# Altium PCB PCB1.PcbDoc
Units mil, origin at the board's own origin, x right, y up, seen from the top; angles counter-clockwise.
Board outline 1989.03 x 1762.03 mil, 2 copper layers (Top Layer, Bottom Layer); 10 components, 18 nets, 219 pads, 0 vias.
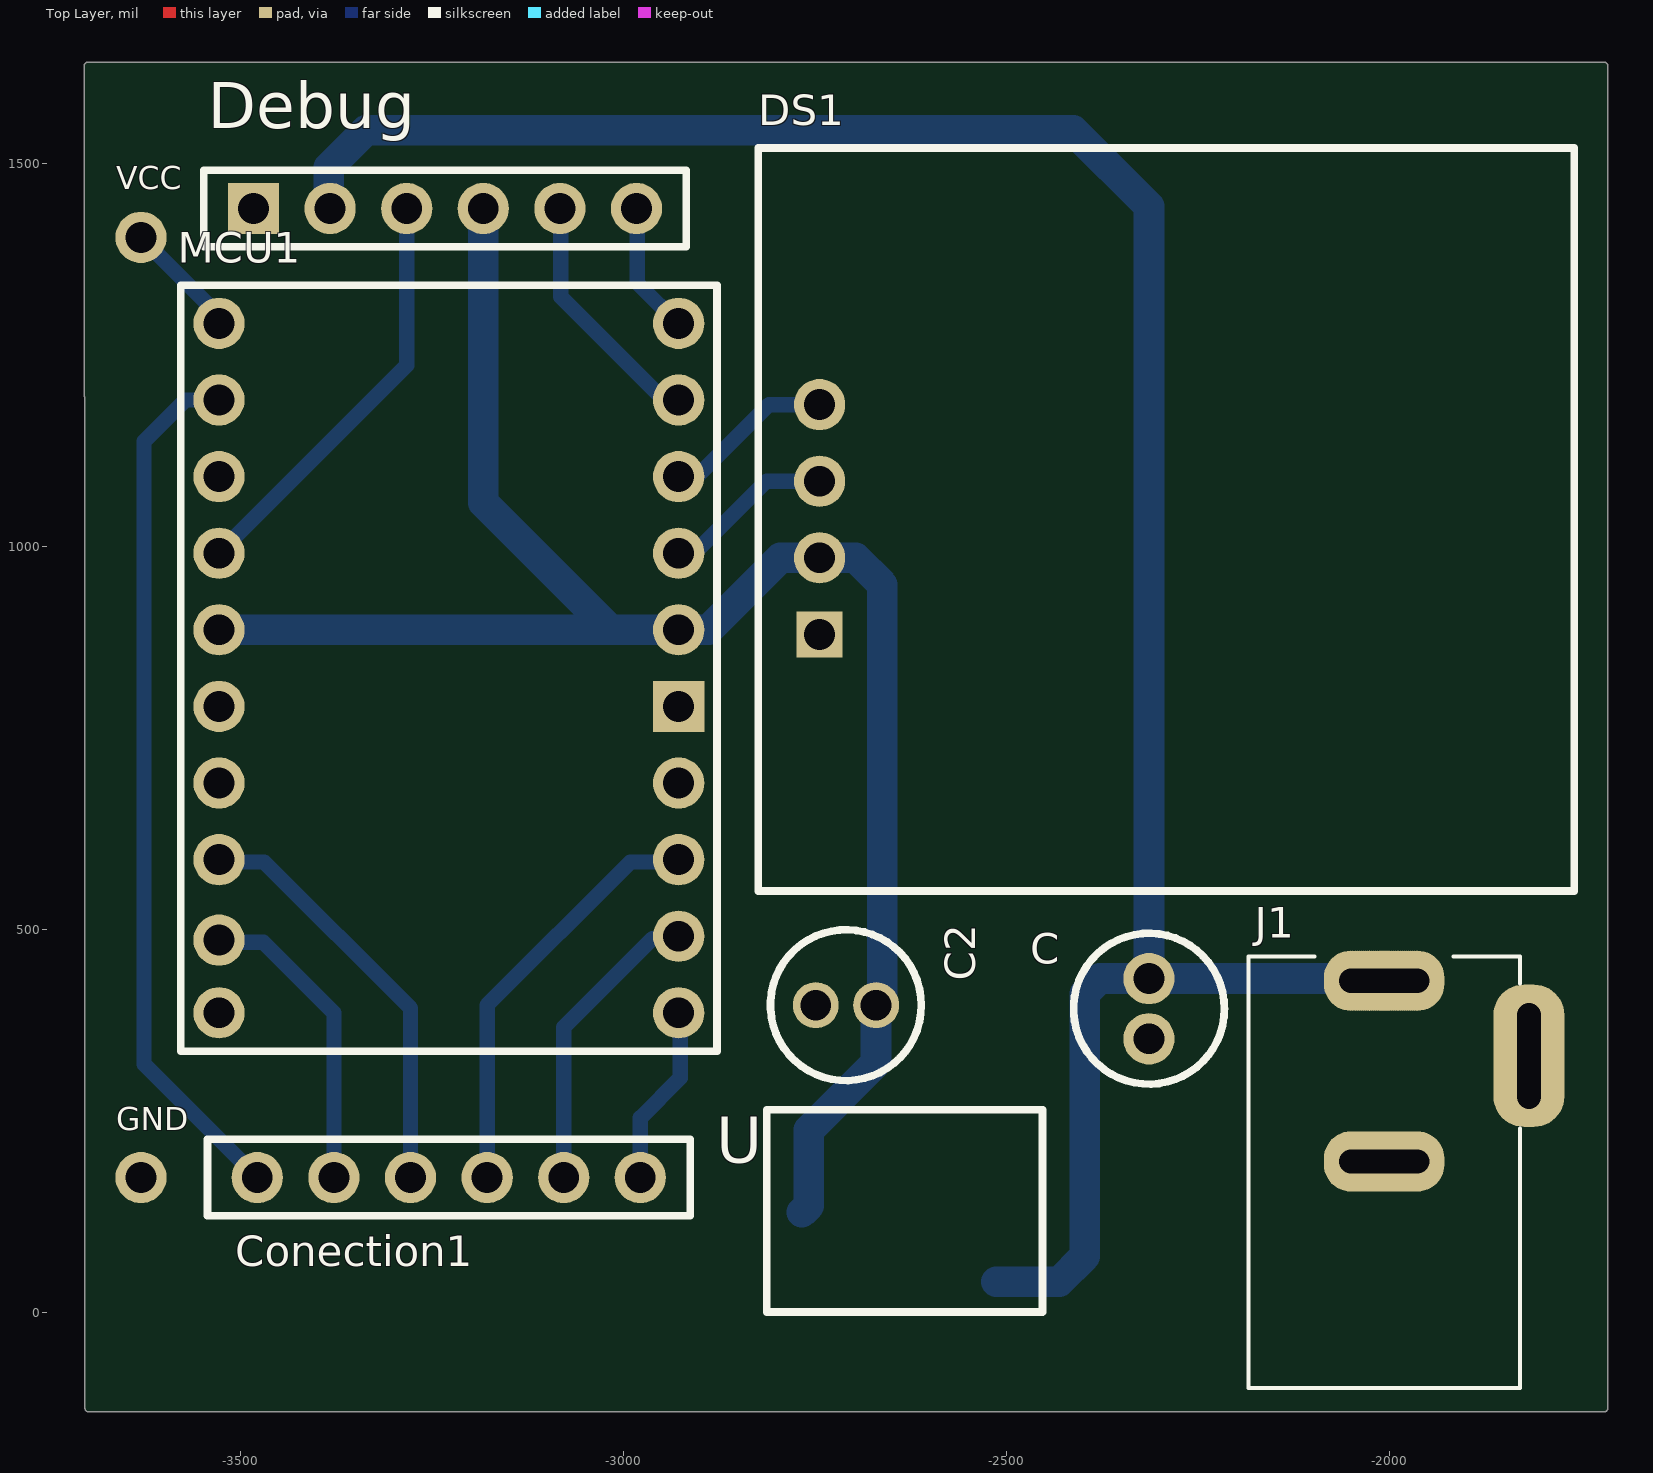
[diagram p0: Top Layer view]
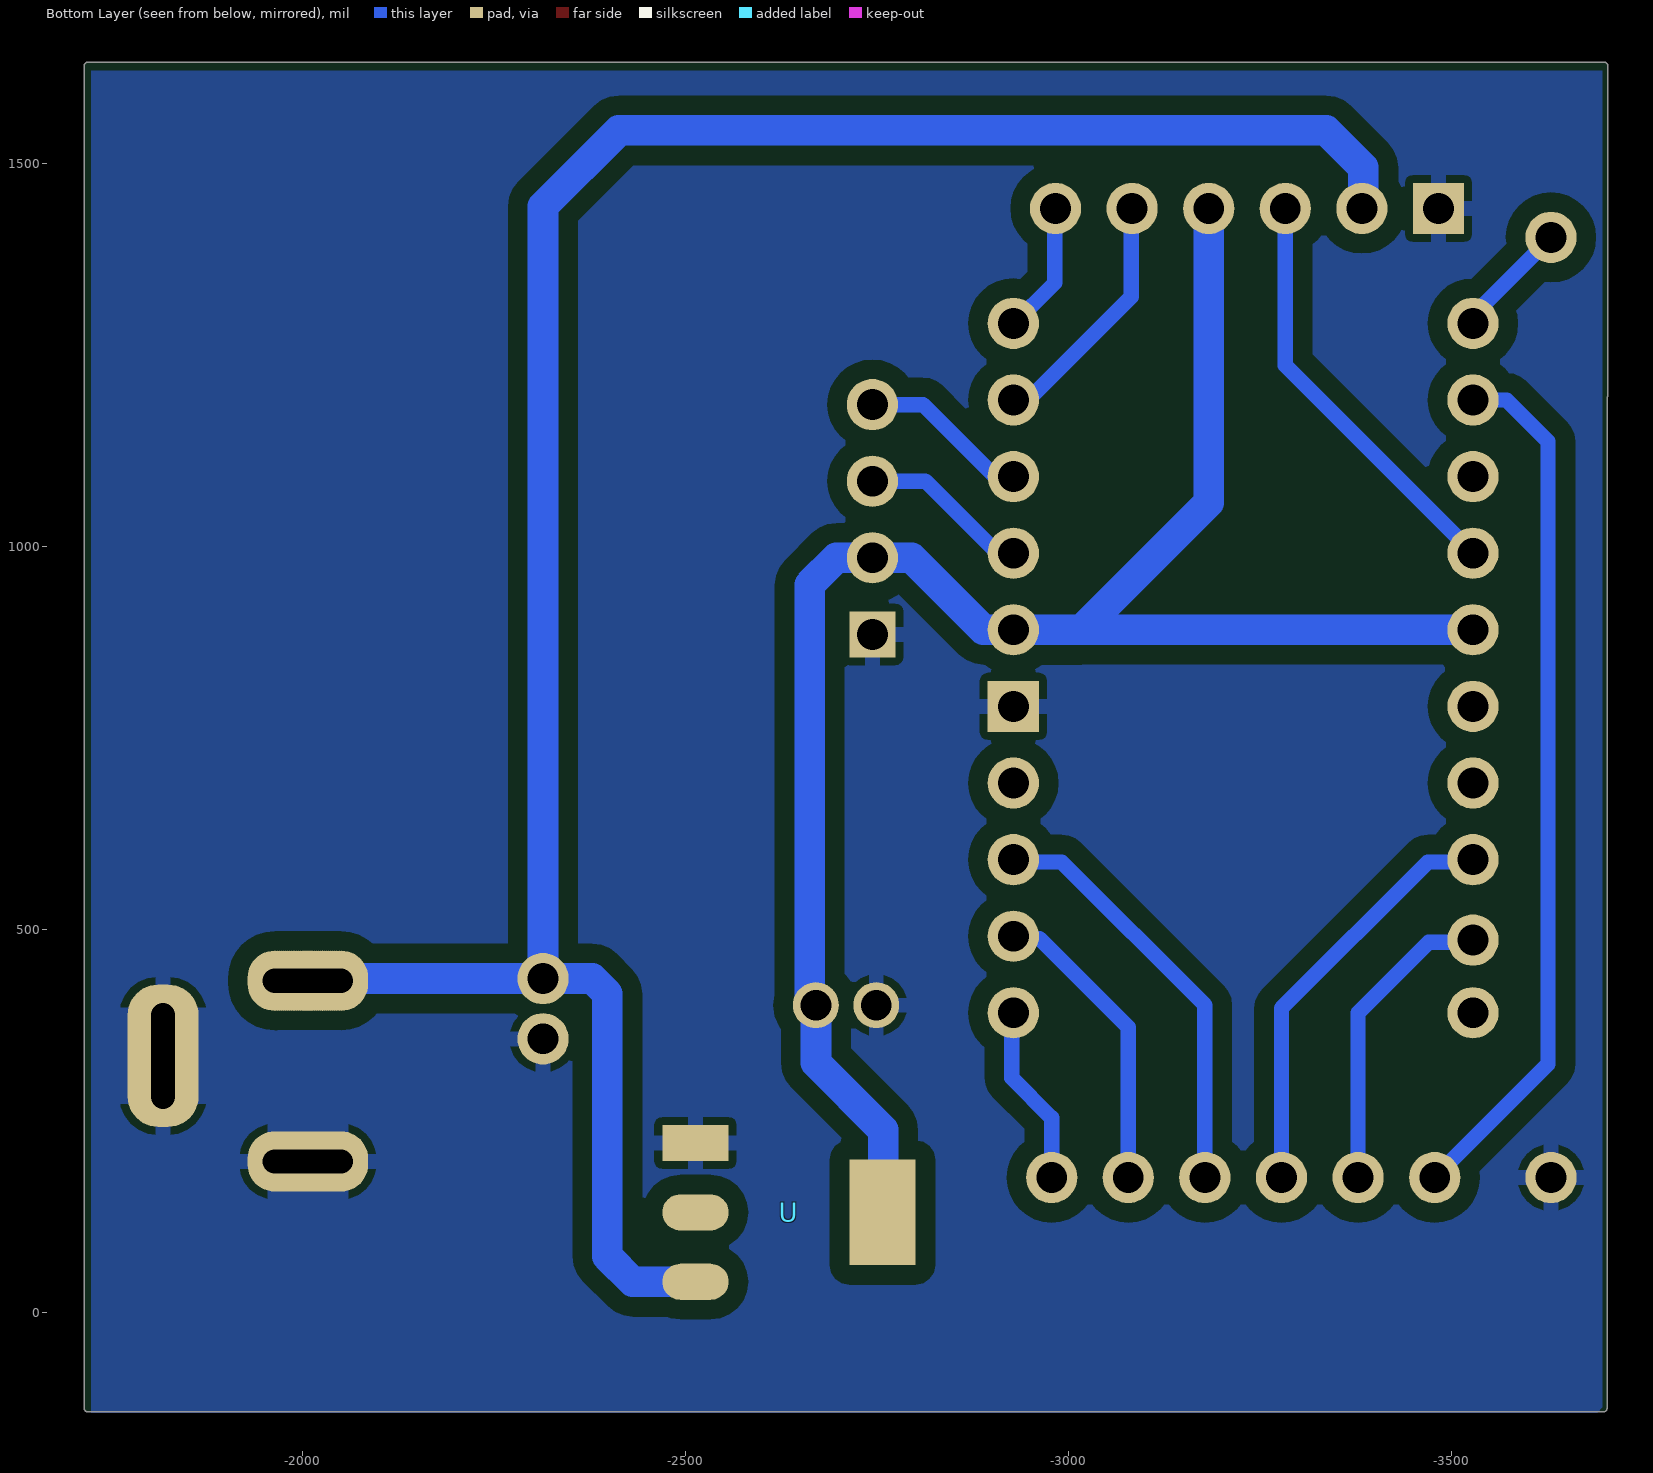
[diagram p1: Bottom Layer view, seen from below]

## Layer stack, top to bottom
Top Solder: solder mask 0.4, Solder Resist, Dk 3.5
Top Layer: signal copper 1.4
Dielectric 1: dielectric 12.6, FR-4, Dk 4.8
Bottom Layer: signal copper 1.4
Bottom Solder: solder mask 0.4, Solder Resist, Dk 3.5

## Board outline
-3703.01,-125 -3703.01,1193.99 cw(c-3699,1197) -3704.01,1197 -3704.01,1627 cw(c-3699,1627) -3699,1632.02 -1720,1632.02 cw(c-1720,1627) -1714.98,1627 -1714.98,-125 cw(c-1720,-125) -1720,-130.01 -3698,-130.01 cw(c-3698,-125)

## Design rules (kind name [scope] priority, off if disabled: settings)
Clearance [All] p1: gap=25 ignorepadtopadclearanceinfootprint=TRUE
HoleToHoleClearance [Not InComponent('J1')] p1: gap=10 allowstackedmicrovias=TRUE
PlaneConnect [InNet('GND')] p1: planeconnectstyle=Relief reliefexpansion=20 reliefentries=4 reliefconductorwidth=20 reliefairgap=10
PolygonConnect [InNet('GND') vs InNet('GND')] p1: connectstyle=Relief reliefconductorwidth=20 reliefentries=4 polygonreliefangle="90 Angle" airgapwidth=10
RoutingVias [All] p1: holewidth=28 width=50 viastyle="Through Hole" minholewidth=28 minwidth=50 maxholewidth=28 maxwidth=50
SolderMaskExpansion [All] p1: expansion=4
Width [All] p1: maxlimit=50 minlimit=10 preferedwidth=10 minimp=50.000000 maximp=50.000000 favimp=50.000000
28 further rules are at their usual default settings.

## Components (designator, comment, footprint, x,y, rotation, side; value= is the part's Value field where it differs from the comment)
C "Capacitor Eletrolítico" Capacitor#1 -2314,435.74 r270 top value="R$: 0.70 /5 unidades"
C2 "22uF" Capacitor#2 -2670.26,401 r180 top value="R$: 0.70 /5 unidades"
Conection1 "Conectionwires" CONECTIONWIRES -2908,216 r180 top
Debug "Debugwires" DEBUGWIRES -2913,1496 r180 top
DS1 "Display 0.96 pol" "Display oled" -2744,885 r90 top
GND "Pad" Pad -3629.82,176 r90 top
J1 "DC-005" NINIGI_DC-005 -1817,-105.5 r90 top
MCU1 "Processor" Processor -3528,591 r0 top
U "AZ1117" AZ1117 -2513,39.9 r90 top
VCC "Pad" Pad -3629.81,1403.23 r90 top

## Footprints (in the part's own frame and the unit in brackets; to place one, negate y for a bottom-side part, rotate by r counter-clockwise, add the part's x,y. Pads: shape width x height; smd on the part's side, far side on the other; paste and mask are expansions set on the pad)
AZ1117 [mm]
  rect 1.2x2.2 smd far side: GND(4.6,0)
  oval 1.2x2.2 smd far side: V-IN(0,0) V-OUT-1(2.3,0)
  rect 3.5x2.2 smd far side: V-OUT(2.3,6.2)
  silkscreen extent -1,-1.52 5.7,7.62
Capacitor#1 [mm]
  round 1.7 hole 1.016: +(0,0) -(2,0)
  silkscreen extent -1.5,-2.5 3.5,2.5
Capacitor#2 [mm]
  round 1.524 hole 1.016: +(0,0) -(2,0)
  silkscreen extent -1.5,-2.5 3.5,2.5
CONECTIONWIRES [mm]
  round 1.7 hole 1.02: PA2(9.398,1.016) PA3(11.938,1.016) PA5(1.778,1.016) PA6(4.318,1.016) PA7(6.858,1.016) PF-0(14.478,1.016)
  silkscreen extent 0.13,-0.25 16.13,2.29
DEBUGWIRES [mm]
  round 1.7 hole 1.02: 3v3(6.858,1.397) PA13(4.318,1.397) PA14(1.778,1.397) RESET(9.398,1.397) VCC(11.938,1.397)
  rect 1.7x1.7 hole 1.02: GND(14.478,1.397)
  silkscreen extent 0.13,0.13 16.13,2.67
"Display oled" [mm] "24.7x27"
  rect 1.524x1.524 hole 1.02: GND(0,0)
  round 1.7 hole 1.02: SCK(5.08,0) SDA(7.62,0) VCC(2.54,0)
  silkscreen extent -8.51,-25.02 16.13,2.03
NINIGI_DC-005 [mm]
  oval 2x2.35 hole 0.8: 2(9.83,0.025) 2(9.902,0.025) 2(9.974,0.025) 2(10.046,0.025) 2(10.109,0.025) 2(10.181,0.025) 2(10.253,0.025) 2(10.325,0.025) 2(10.389,0.025) 2(10.46,0.025) 2(10.532,0.025) 2(10.604,0.025) 2(10.668,0.025) 2(10.74,0.025) 2(10.812,0.025) 2(10.884,0.025) 2(10.947,0.025) 2(11.019,0.025) 2(11.091,0.025) 2(11.163,0.025) 2(11.227,0.025) 2(11.299,0.025) 2(11.371,0.025) 2(11.443,0.025) 2(11.506,0.025) 2(11.578,0.025) 2(11.65,0.025) 2(11.722,0.025) 2(11.786,0.025) 2(11.857,0.025) 2(11.929,0.025) 2(12.001,0.025) 2(12.065,0.025) 2(12.137,0.025) 2(12.209,0.025) 2(12.281,0.025) 2(12.344,0.025) 2(12.416,0.025) 2(12.492,0.025) 2(12.518,0.025) 2(12.543,0.025)
  oval 2x1.8 hole 0.8: 3(7.682,3.729) 3(7.682,3.75) 3(7.682,3.818) 3(7.682,3.818) 3(7.682,3.886) 3(7.682,3.886) 3(7.682,3.954) 3(7.682,3.954) 3(7.682,4.022) 3(7.682,4.022) 3(7.682,4.09) 3(7.682,4.09) 3(7.682,4.158) 3(7.682,4.158) 3(7.682,4.226) 3(7.682,4.226) 3(7.682,4.294) 3(7.682,4.362) 3(7.682,4.375) 3(7.682,4.443) 3(7.682,4.511) 3(7.682,4.511) 3(7.682,4.579) 3(7.682,4.579) 3(7.682,4.647) 3(7.682,4.647) 3(7.682,4.69) 3(7.682,4.715) 3(7.682,4.715) 3(7.682,4.758) 3(7.682,4.783) 3(7.682,4.783) 3(7.682,4.826) 3(7.682,4.826) 3(7.682,4.851) 3(7.682,4.851) 3(7.682,4.894) 3(7.682,4.894) 3(7.682,4.919) 3(7.682,4.962) 3(7.682,4.962) 3(7.682,4.987) 3(7.682,5.03) 3(7.682,5.03) 3(7.682,5.098) 3(7.682,5.098) 3(7.682,5.166) 3(7.682,5.166) 3(7.682,5.234) 3(7.682,5.302) 3(7.682,5.315) 3(7.682,5.383) 3(7.682,5.451) 3(7.682,5.451) 3(7.682,5.519) 3(7.682,5.519) 3(7.682,5.587) 3(7.682,5.587) 3(7.682,5.655) 3(7.682,5.655) 3(7.682,5.723) 3(7.682,5.723) 3(7.682,5.791) 3(7.682,5.791) 3(7.682,5.859) 3(7.682,5.927) 4(13.676,3.729) 4(13.676,3.75) 4(13.676,3.818) 4(13.676,3.818) 4(13.676,3.886) 4(13.676,3.886) 4(13.676,3.954) 4(13.676,3.954) 4(13.676,4.022) 4(13.676,4.022) 4(13.676,4.09) 4(13.676,4.09) 4(13.676,4.158) 4(13.676,4.158) 4(13.676,4.226) 4(13.676,4.226) 4(13.676,4.294) 4(13.676,4.362) 4(13.676,4.375) 4(13.676,4.443) 4(13.676,4.511) 4(13.676,4.511) 4(13.676,4.579) 4(13.676,4.579) 4(13.676,4.647) 4(13.676,4.647) 4(13.676,4.69) 4(13.676,4.715) 4(13.676,4.715) 4(13.676,4.758) 4(13.676,4.783) 4(13.676,4.783) 4(13.676,4.826) 4(13.676,4.826) 4(13.676,4.851) 4(13.676,4.851) 4(13.676,4.894) 4(13.676,4.894) 4(13.676,4.919) 4(13.676,4.962) 4(13.676,4.962) 4(13.676,4.987) 4(13.676,5.03) 4(13.676,5.03) 4(13.676,5.098) 4(13.676,5.098) 4(13.676,5.166) 4(13.676,5.166) 4(13.676,5.234) 4(13.676,5.302) 4(13.676,5.315) 4(13.676,5.383) 4(13.676,5.451) 4(13.676,5.451) 4(13.676,5.519) 4(13.676,5.519) 4(13.676,5.587) 4(13.676,5.587) 4(13.676,5.655) 4(13.676,5.655) 4(13.676,5.723) 4(13.676,5.723) 4(13.676,5.791) 4(13.676,5.791) 4(13.676,5.859) 4(13.676,5.927)
  silkscreen extent 0.18,0.33 14.48,9.33
Pad [mm] "A simple pad to connections"
  round 1.7 hole 1.02: Pad(0,0)
Processor [mm]
  round 1.7 hole 1.02: 3v3(0,7.62) 3v3(15.24,7.62) BOOT0(0,17.78) NRST(0,10.16) PA0(0,5.08) PA1(0,2.54) PA2(0,0) PA3(0,-2.667) PA4(0,-5.08) PA5(15.24,-5.08) PA6(15.24,-2.54) PA7(15.24,0) PA9(15.24,10.16) PA10(15.24,12.7) PA13(15.24,15.24) PA14(15.24,17.78) PB1(15.24,2.54) PF0(0,15.24) PF1(0,12.7)
  rect 1.7x1.7 hole 1.02: GND(15.24,5.08)
  silkscreen extent -1.27,-6.35 16.51,19.05

## Part data
C2: library part "Capacitor Eletrolítico", Availability=Avaliable, Datasheet_link=https://www.electron.com/electrolytic-capacitor-jamicon-skr220m1ed11m-p1278/, Link_Autocore=https://www.autocorerobotica.com.br/capacitor-eletrolitico-22uf-25v-kit-com-5-unidades
Conection1: "6 out", buy=https://www.autocorerobotica.com.br/barra-pinos-macho-180, Dimensões=https://www.autocorerobotica.com.br/barra-de-40-pinos-femea-x5-unidades
Debug: "2 in", buy=https://www.autocorerobotica.com.br/barra-de-40-pinos-femea-x5-unidades
DS1: library part "Display oled", "0.96 pol 24.7x27 cm", Informations="Display oled 0.96 pol 128x64", link_mercadolivre=https://produto.mercadolivre.com.br/MLB-1549862447-display-oled-096-azul-amarelo-i2c-128x64-arduino-raspberry-_JM?quantity=1#position=4&type=item&tracking_id=dc610daf-3617-4627-bdd2-8ae4acf904ab, link to buy and measurements=https://pt.aliexpress.com/item/32896971385.html?spm=a2g0o.productlist.0.0.6ecd7bb88K6sVT&algo_pvid=5cb829e2-0bf1-4f55-8bae-71a0ff6fa1f2&algo_expid=5cb829e2-0bf1-4f55-8bae-71a0ff6fa1f2-0&btsid=0ab50f6215875744850722033e6e98&ws_ab_test=searchweb0_0,searchweb201602_,searchweb201603_
J1: "Polymeric PTC Resettable Fuse 15V 50mA Ih Surface Mount 0603 _1608 Metric_, Concave", Package="0603 Ninigi", Availability=Unavailable, link_mercadolivre=https://produto.mercadolivre.com.br/MLB-1497128338-10-pecas-jack-j4-21mm-para-placa-plug-p4-arduino-_JM?quantity=1#position=1&type=item&tracking_id=8412b441-44a9-4b74-b006-990053047356, MF="Littelfuse Inc.", MP=DC-005, Price=None, SnapEDA_Link=https://www.snapeda.com/parts/DC-005/Littelfuse%20Inc./view-part/2874446/?ref=snap
MCU1: "Processor arm Stm32f0xx", Adapter="SOP20 TO DIP20", Link to buy=https://www.autocorerobotica.com.br/adaptador-sop20-ssop20-tssop20-smd-para-dip-20, Measurements link=https://alltopnotch.co.uk/product/2-x-sop20-s020-soic20-tssop20-msop20-to-dip20-adapter-board-smd-breakout/
U: "Converter 5v to 3.3v", Availability=Avaliable, Datasheet_link=https://www.digikey.com/en/datasheets/diodes-incorporated/diodes-incorporated-az1117c, Fornecimento="5 unidades dadas pelo LESC", Link_to_buy=https://produto.mercadolivre.com.br/MLB-1647161150-transistor-az1117-25tre1-az1117-25-1117-25-kit-5-pecas-_JM#position=1&type=item&tracking_id=ce52b624-396d-47aa-8cab-d923e44ab95b, Price="R$ 34.00 / 50 unidades"
C: Availability=Avaliable, Datasheet_link=https://www.electron.com/electrolytic-capacitor-jamicon-skr220m1ed11m-p1278/, Link_Autocore=https://www.autocorerobotica.com.br/capacitor-eletrolitico-22uf-25v-kit-com-5-unidades

## Nets (pads, with @x,y where several pads share a name; then routed paths per layer and width w, separated by ;. In a path a pad name is that pad's centre, name@x,y a point inside that pad or via, vN(x,y) a via of type N, cw(c..) or ccw(c..) an arc to the next point about the centre after c; other vN are vias at no path point)
BOOT0: MCU1.BOOT0 VCC.Pad | length 154.4
  Bottom Layer w20: VCC.Pad -3528,1301.42 MCU1.BOOT0
GND: C2.- C.- Debug.GND DS1.GND GND.Pad J1.2 J1.3 MCU1.GND U.GND
NRST: Debug.RESET MCU1.NRST | length 551.5
  Bottom Layer w20: MCU1.NRST -3283,1236 Debug.RESET
PA0: MCU1.PA0 | length 12
  Bottom Layer w20: MCU1.PA0@-3540,791 MCU1.PA0
PA1: MCU1.PA1
PA2: Conection1.PA2 MCU1.PA2 | length 550.1
  Bottom Layer w20: MCU1.PA2@-3528,588 -3469,588 -3278,397 Conection1.PA2
PA3: Conection1.PA3 MCU1.PA3 | length 401.1
  Bottom Layer w20: MCU1.PA3@-3526,483 -3470,483 -3378,391 Conection1.PA3
PA4: MCU1.PA4
PA5: Conection1.PA5 MCU1.PA5 | length 236.5
  Bottom Layer w20: Conection1.PA5 -2978,254 -2926,306 MCU1.PA5@-2926,391
PA6: Conection1.PA6 MCU1.PA6 | length 396
  Bottom Layer w20: Conection1.PA6 -3078,372 -2962,488 MCU1.PA6@-2926,488
PA7: Conection1.PA7 MCU1.PA7 | length 554.5
  Bottom Layer w20: Conection1.PA7 -3178,401 -2991,588 MCU1.PA7@-2926,588
PA9: DS1.SCK MCU1.PA9 | length 222.9
  Bottom Layer w20: MCU1.PA9 -2907,991 -2813,1085 DS1.SCK
PA10: DS1.SDA MCU1.PA10 | length 222.9
  Bottom Layer w20: MCU1.PA10 -2904,1091 -2810,1185 DS1.SDA
PA13: Debug.PA13 MCU1.PA13 | length 328.2
  Bottom Layer w20: Debug.PA13@-3082,1441 -3082,1326 -2944,1188 MCU1.PA13@-2926,1188
PA14: Debug.PA14 MCU1.PA14 | length 176.2
  Bottom Layer w20: Debug.PA14@-2982,1441 -2982,1344 MCU1.PA14@-2926,1288
PF-0: Conection1.PF-0 MCU1.PF0 | length 1142.7
  Bottom Layer w20: MCU1.PF0 -3572,1191 -3626,1137 -3626,324 Conection1.PF-0
VCC: C2.+ Debug.3v3 DS1.VCC MCU1.3v3 U.V-OUT | length 2401.4
  Bottom Layer w40: MCU1.3v3@-3528,891 -3017,891 ; Debug.3v3 -3183,1057 -3017,891 ; U.V-OUT@-2767.09,130.45 -2758,139.54 -2758,238 -2670.26,325.74 C2.+ ; C2.+@-2670.5,401 -2662,409.5 -2662,950 -2697,985 DS1.VCC -2795,985 -2889,891 -2928,891 -3017,891
VCC-IN: C.+ Debug.VCC J1.4 U.V-IN | length 3056.8
  Bottom Layer w40: Debug.VCC@-3384.85,1441 -3384.85,1494.65 -3336.5,1543 -2413,1543 -2314,1444 C.+ ; U.V-IN -2431.1,39.9 -2398,73 -2398,416 -2378.26,435.74 C.+ ; J1.4@-2050.35,432.94 -2047.67,432.93 J1.4@-2045,432.93 ; J1.4@-2039.65,432.93 -2042.32,435.61 -2042.46,435.74 C.+ ; J1.4@-2039.64,433 -2028.93,433 J1.4@-2023.06,433 ; J1.4@-2007,432.93 J1.4@-2005.32,432.93
pads on no net: MCU1.PB1 MCU1.PF1 U.V-OUT-1

## Polygon pours and split planes (outlines as drawn)
GND on Bottom Layer "Top Layer-No Net 2" (solid, remove dead copper, pour order 12): -3697,1621 -1724,1621 -1724,-131 -3690,-131 -3697,-124

## Silkscreen, mask and mechanical layers (free items; w line width, h text height)
Mechanical 1:
  lines w10: -3699,1197 -3699,1627 -1720,1627 -1720,-125 -3698,-125 -3698,310 -3698,1196 -3699,1197